# EAGLE board octanis_eps_v05 (EAGLE 7.2.0)
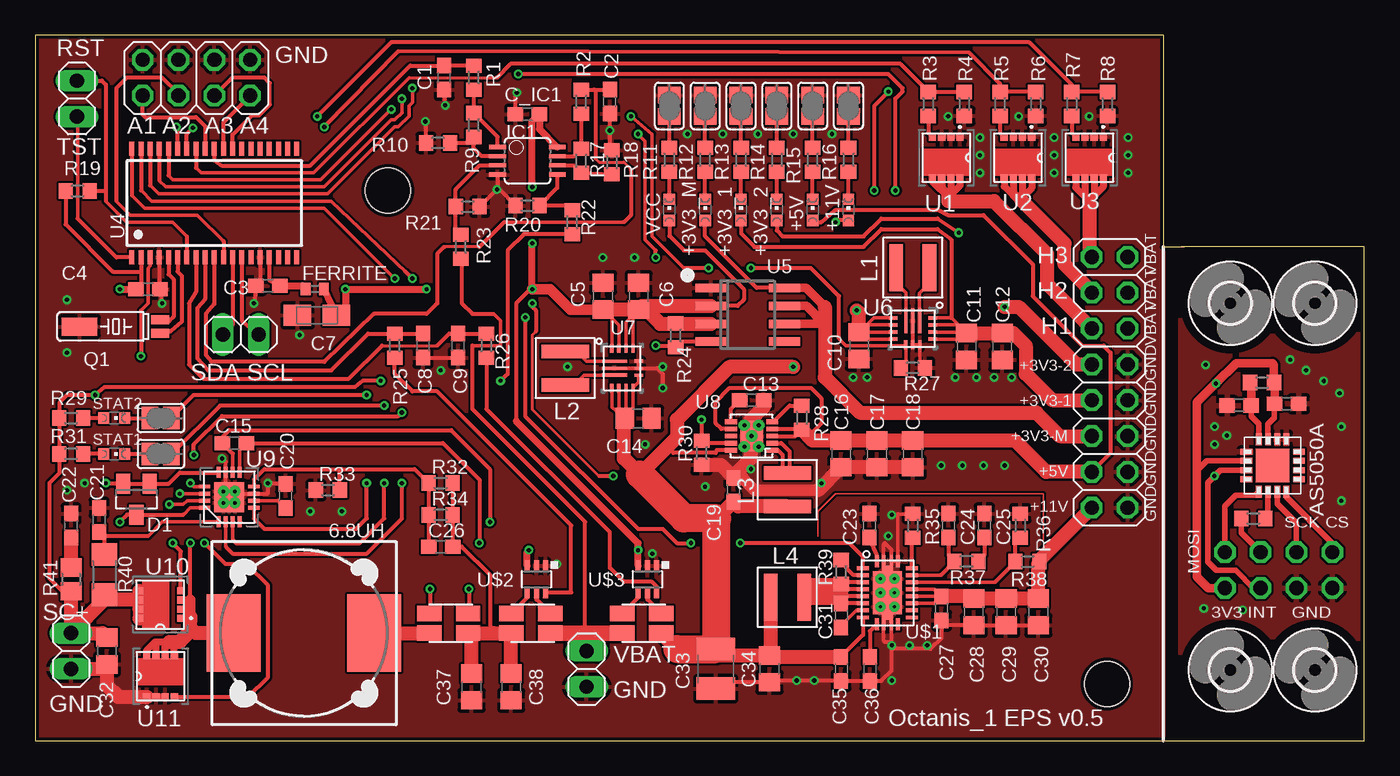
[diagram p0: board, top side]
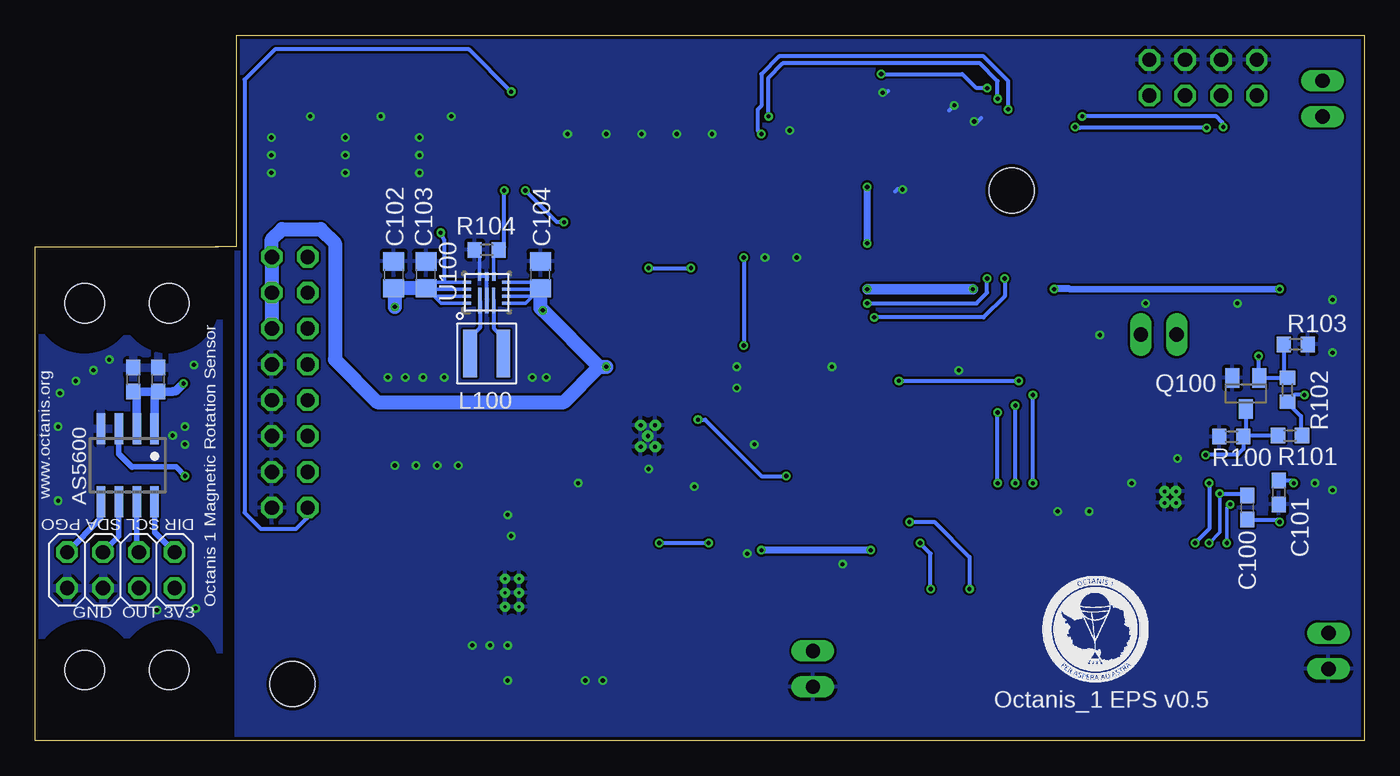
[diagram p1: board, bottom side, seen from below]

Size 94.25 x 50 mm. Coordinates in mm from the lower left corner, seen from the top.
Outline: 81.5,35 94.25,35 94.25,0 80,0 0,0 0,50 80,50 80,35 81.5,35
Outline: 81.5,35 81.25,35
Copper layers (1*16): Top 0.035mm / dielectric 1.5mm / Bottom 0.035mm
Design rules "SeeedStudio_2layer_DRU_no_angle_20140221 *": minimum track width 6mil, minimum drill 0.3mm, track to track 6mil, track to pad 6mil, pad to pad 6mil, via to via 6mil, smd to smd 0mil, copper to edge 10mil, drill to drill 10mil, minimum pad ring 10mil, minimum via ring 6mil, stop-mask expansion 2mil, vias tented up to drill 100mil, thermal gap 10mil
Net classes: 0 default: clearance 0.152 mm; 1 power: width 0.203 mm, drill 0.305 mm, clearance 0.152 mm; 3 fine: width 0.406 mm, drill 0.61 mm, clearance 0.152 mm
Holes 3.2 mm at 25,39 76,4

## Footprints (pad centres in the part's own frame; a part is rotated, then mirrored left to right if it is on the bottom)
DR127 = smd 3.85 x 5.5: 1 -4.975,0; 2 4.975,0
CHIPLED_0603 = smd 0.8 x 0.8: A 0,-0.75; C 0,0.75
SOIC-8 = smd 0.6 x 2.2: 1 -1.215,-2.62; 2 0.055,-2.62; 3 1.325,-2.62; 4 2.595,-2.62; 5 2.595,2.58; 6 1.325,2.58; 7 0.055,2.58; 8 -1.215,2.58
C0603 = smd 1.1 x 1: 1 -0.85,0; 2 0.85,0
C0805 = smd 1.3 x 1.5: 1 -0.95,0; 2 0.95,0
A/3216-18R = smd 1.95 x 1.5: + 1.375,0; - -1.375,0
C1210 = smd 1.6 x 2.7: 1 -1.4,0; 2 1.4,0
SOT23 = smd 1 x 1.4: 1 -0.95,-1.1; 2 0.95,-1.1; 3 0,1.1
0402 = smd 0.7 x 0.9: 1 -0.65,0; 2 0.65,0
2,8 = hole 2.8: 0,0
MSOP08 = smd 0.3 x 1.2: 1 -0.976,-2.113; 2 -0.326,-2.113; 3 0.324,-2.113; 4 0.974,-2.113; 5 0.974,2.112; 6 0.324,2.112; 7 -0.326,2.112; 8 -0.976,2.112
SJ = smd 1.168 x 1.6: 1 -0.762,0; 2 0.762,0
2X04 = drill 1.016 octagon: 1 -3.81,-1.27; 2 -3.81,1.27; 3 -1.27,-1.27; 4 -1.27,1.27; 5 1.27,-1.27; 6 1.27,1.27; 7 3.81,-1.27; 8 3.81,1.27
1X02 = drill 1.016 long: 1 -1.27,0; 2 1.27,0
2X08 = drill 1.016 octagon: 1 -8.89,-1.27; 2 -8.89,1.27; 3 -6.35,-1.27; 4 -6.35,1.27; 5 -3.81,-1.27; 6 -3.81,1.27; 7 -1.27,-1.27; 8 -1.27,1.27; 9 1.27,-1.27; 10 1.27,1.27; 11 3.81,-1.27; 12 3.81,1.27; 13 6.35,-1.27; 14 6.35,1.27; 15 8.89,-1.27; 16 8.89,1.27
XFL4020 = smd 0.965 x 3.353: P$1 -1.181,0; P$2 1.181,0
MS3V-T1R = smd 0.635 x 1.27: P1 -0.47,-4.43; P2 0.47,-4.43 | smd 1.27 x 2.54: P3 0,1.3
R0603 = smd 1 x 1.1: 1 -0.85,0; 2 0.85,0
R1206 = smd 1.6 x 1.803: 1 -1.422,0; 2 1.422,0
R2012 = smd 1.3 x 1.5: 1 -0.85,0; 2 0.85,0
4PADS_RESISTOR = smd 1.727 x 1.1: I1 0,0; I2 2.751,0; V1 0,1.4; V2 2.751,1.4
DQG8 = smd 0.559 x 0.508: 1 -1.47,0.975; 2 -1.47,0.325; 3 -1.47,-0.325; 4 -1.47,-0.975; 5 1.47,-0.975; 6 1.47,-0.325; 7 1.47,0.325; 8 1.47,0.975
TSSOP38_MSPGXX44_SERIES = smd 0.35 x 1: 1 -5.85,-3.85; 2 -5.2,-3.85; 3 -4.55,-3.85; 4 -3.9,-3.85; 5 -3.25,-3.85; 6 -2.6,-3.85; 7 -1.95,-3.85; 8 -1.3,-3.85; 9 -0.65,-3.85; 10 0,-3.85; 11 0.65,-3.85; 12 1.3,-3.85; 13 1.95,-3.85; 14 2.6,-3.85; 15 3.25,-3.85; 16 3.9,-3.85; 17 4.55,-3.85; 18 5.2,-3.85; 19 5.85,-3.85; 20 5.85,3.85; 21 5.2,3.85; 22 4.55,3.85; 23 3.9,3.85; 24 3.25,3.85; 25 2.6,3.85; 26 1.95,3.85; 27 1.3,3.85; 28 0.65,3.85; 29 0,3.85; 30 -0.65,3.85; 31 -1.3,3.85; 32 -1.95,3.85; 33 -2.6,3.85; 34 -3.25,3.85; 35 -3.9,3.85; 36 -4.55,3.85; 37 -5.2,3.85; 38 -5.85,3.85
SO8 = smd 0.6 x 2.2: 1 -1.905,-2.6; 2 -0.635,-2.6; 3 0.635,-2.6; 4 1.905,-2.6; 5 1.905,2.6; 6 0.635,2.6; 7 -0.635,2.6; 8 -1.905,2.6
RNC0014A = smd 1.778 x 0.229: 1 -0.555,0.49; 2 -0.555,0; 3 -0.555,-0.49 | smd 0.229 x 0.61: 4 -0.75,-1.4; 5 -0.25,-1.4; 6 0.25,-1.4; 7 0.75,-1.4; 11 0.75,1.4; 12 0.25,1.4; 13 -0.25,1.4; 14 -0.75,1.4 | smd 0.61 x 0.229: 8 1.15,-0.5; 9 1.15,0; 10 1.15,0.5
S-PVSON-N10 = smd 0.28 x 0.825: 1 -1,-1.462; 2 -0.5,-1.462; 3 0,-1.462; 4 0.5,-1.462; 5 1,-1.462; 6 1,1.462; 7 0.5,1.462; 8 0,1.462; 9 -0.5,1.462; 10 -1,1.462 | smd 2.15 x 1.6: EXPAD 0,0 | drill 0.3 pad 0.605: GND1 -0.762,0.508 | drill 0.3 pad 0.61: GND2 -0.762,-0.508; GND3 0,0; GND4 0.762,-0.508 | drill 0.305 pad 0.605: GND5 0.762,0.508
RVA16_2P14X2P14 = smd 0.787 x 0.279: 1 -1.75,0.75; 2 -1.75,0.25; 3 -1.75,-0.25; 4 -1.75,-0.75; 9 1.75,-0.75; 10 1.75,-0.25; 11 1.75,0.25; 12 1.75,0.75 | smd 0.279 x 0.787: 5 -0.75,-1.75; 6 -0.25,-1.75; 7 0.25,-1.75; 8 0.75,-1.75; 13 0.75,1.75; 14 0.25,1.75; 15 -0.25,1.75; 16 -0.75,1.75 | smd 2.134 x 2.134: 17 0,0 | drill 0.254: V -0.406,-0.406; V_1 -0.406,0.406; V_2 0.406,-0.406; V_3 0.406,0.406
R-PVQFN-N20 = smd 0.85 x 0.28: P$1 0,0; P$10 4.45,0; P$11 4.45,1.5; P$20 0,1.5 | smd 0.28 x 0.85: P$2 0.475,-0.975; P$3 0.975,-0.975; P$4 1.475,-0.975; P$5 1.975,-0.975; P$6 2.475,-0.975; P$7 2.975,-0.975; P$8 3.475,-0.975; P$9 3.975,-0.975; P$12 3.975,2.475; P$13 3.475,2.475; P$14 2.975,2.475; P$15 2.475,2.475; P$16 1.975,2.475; P$17 1.475,2.475; P$18 0.975,2.475; P$19 0.475,2.475 | smd 3.05 x 2.05: PGND1 2.225,0.75 | smd 1.15 x 0.23: PGND2 0.15,1.025; PGND3 0.15,0.475; PGND4 4.3,0.475; PGND5 4.3,1.025 | smd 3.85 x 0.78: PGND6 2.225,0.75 | drill 0.2 pad 0.4: PGND7 2.225,0.25; PGND8 1.225,0.25; PGND9 1.225,1.25; PGND10 2.225,1.25; PGND11 3.225,0.25; PGND12 3.225,1.25
SC70-6 = smd 0.35 x 0.8: 1 -0.65,-0.95; 2 0,-0.95; 3 0.65,-0.95; 4 0.65,0.95; 5 0,0.95; 6 -0.65,0.95
QFN.16 = smd 0.85 x 0.42: 1 -1.875,0.975; 2 -1.875,0.325; 3 -1.875,-0.325; 4 -1.875,-0.975; 9 1.875,-0.975; 10 1.875,-0.325; 11 1.875,0.325; 12 1.875,0.975 | smd 0.42 x 0.85: 5 -0.975,-1.875; 6 -0.325,-1.875; 7 0.325,-1.875; 8 0.975,-1.875; 13 0.975,1.875; 14 0.325,1.875; 15 -0.325,1.875; 16 -0.975,1.875 | smd 2.4 x 2.4: PAD 0,0

## Placement (x,y rotation side)
6.8UH  DR127  [DR127]  19.05,7.62 0 top
+3V3_1  3V3-1  [CHIPLED_0603]  50.05,37.62 0 top
+3V3_2  3V3-2  [CHIPLED_0603]  52.59,37.62 0 top
+3V3_M  3V3-M  [CHIPLED_0603]  47.51,37.62 0 top
+5V  5V  [CHIPLED_0603]  55.13,37.62 0 top
+11V  12V  [CHIPLED_0603]  57.67,37.62 0 top
AS5600  AS5600  [SOIC-8]  87,19.5 180 bottom
C1  1.5uF  [C0603]  29,47 90 top
C2  1.5uF  [C0603]  40.75,45.29 90 top
C3  100nF  [C0603]  16.5,32.25 180 top
C4  100nF  [C0603]  8,32 0 top
C5  22uF  [C0805]  40.27,31.5 90 top
C6  22uF  [C0805]  42.79,31.5 90 top
C7  10uF  [A/3216-18R]  19.98,30.15 0 top
C8  1.5uF  [C0603]  27.5,28 90 top
C9  1.5uF  [C0603]  30,28 90 top
C10  10uF  [C0805]  58.42,28 270 top
C11  22uF  [C0805]  66.04,27.94 270 top
C12  22uF  [C0805]  68.58,27.94 270 top
C13  10nF  [C0603]  50.8,24.13 0 top
C14  10uF  [C0805]  42.75,22.84 0 top
C15  100nF  [C0603]  14.11,21.09 180 top
C16  22uF  [C0805]  57.15,20.32 270 top
C17  22uF  [C0805]  59.69,20.32 270 top
C18  22uF  [C0805]  62.23,20.32 270 top
C19  22uF  [C0603]  49.53,17.78 90 top
C20  1uF  [C0603]  17.76,17.34 90 top
C21  1u  [C0603]  4.53,15.65 90 top
C22  2.2uF  [C0603]  2.54,15.24 90 top
C23  2.2uF  [C0603]  59.17,15.24 90 top
C24  150pF  [C0603]  64.77,15.24 90 top
C25  4.7nF  [C0603]  67.31,15.24 90 top
C26  22pF  [C0603]  28.75,13.75 180 top
C27  1uF  [C0603]  64.27,9.37 90 top
C28  22uF  [C0805]  66.56,9.12 90 top
C29  22uF  [C0805]  68.85,9.12 90 top
C30  22uF  [C0805]  71.14,9.12 90 top
C31  100nF  [C0603]  57.15,8.87 270 top
C32  10uF  [C0805]  5.08,6.35 90 top
C33  47uF Tantal  [C1210]  48.26,5.08 270 top
C34  10uF  [C0805]  52.07,5.08 270 top
C35  100nF  [C0603]  57.15,5.08 270 top
C36  47nF  [C0603]  59.19,5.08 270 top
C37  10uF  [C0805]  30.94,3.81 270 top
C38  10uF  [C0805]  33.75,3.81 270 top
C39  4u7  [C0603]  85.38,23.75 0 top
C40  100n  [C0603]  88.75,23.88 0 top
C41  10u  [C0603]  87.3,25.6 270 bottom
C42  100n  [C0603]  85.54,25.6 270 bottom
C100  100nF  [C0603]  8.3,16.51 270 bottom
C101  1uF  [C0603]  6.07,17.6 270 bottom
C102  22uF  [C0805]  68.83,33.02 90 bottom
C103  22uF  [C0805]  66.54,33.02 90 bottom
C104  10uF  [C0805]  58.42,33.02 90 bottom
C_IC1  100nF  [C0603]  34.91,44.4 0 top
D1  BAT54C  [SOT23]  7.18,17.11 180 top
FERRITE  100mH  [0402]  19.82,32.02 180 top
H1  MOUNT-HOLE2.8  [2,8]  84.75,5 90 top
H2  MOUNT-HOLE2.8  [2,8]  90.75,5 90 top
H3  MOUNT-HOLE2.8  [2,8]  84.75,31 90 top
H4  MOUNT-HOLE2.8  [2,8]  90.75,31 90 top
IC1  OPA2333DGK  [MSOP08]  34.91,41.1 270 top
J1  [SJ]  44.97,44.99 270 top
J2  [SJ]  47.51,44.99 270 top
J3  [SJ]  50.05,44.99 270 top
J4  [SJ]  52.59,44.99 270 top
J5  [SJ]  55.13,44.99 270 top
J6  [SJ]  57.67,44.99 270 top
J7  [SJ]  8.91,22.86 180 top
J8  [SJ]  8.91,20.32 180 top
JP1  [2X04]  11.43,46.99 0 top
JP2  [1X02]  2.96,45.51 270 top
JP3  [1X02]  14.57,28.78 0 top
JP4  [2X08]  76.2,25.4 90 top
JP5  [1X02]  2.54,6.35 90 top
JP6  [1X02]  39.1,5.08 90 top
JP7  [2X04]  88.17,12.08 180 bottom
L1  1uH  [XFL4020]  62.23,33.52 0 top
L2  1uH  [XFL4020]  37.58,26.4 90 top
L3  1uH  [XFL4020]  53.34,17.78 90 top
L4  1.5uH  [XFL4020]  53.34,10.16 0 top
L100  1uH  [XFL4020]  62.23,27.44 180 bottom
Q1  32.768kHz  [MS3V-T1R]  4.44,29.35 90 top
Q100  BSS123  [SOT23]  8.4,24.61 180 bottom
R1  1k  [R0603]  31.1,47 270 top
R2  1k  [R0603]  38.72,45.29 270 top
R3  1k  [R0603]  63.34,45.13 90 top
R4  1M  [R0603]  65.88,45.13 270 top
R5  1k  [R0603]  68.42,45.13 90 top
R6  1M  [R0603]  70.96,45.13 270 top
R7  1k  [R0603]  73.5,45.13 90 top
R8  1M  [R0603]  76.04,45.13 270 top
R9  100k  [R0603]  31.1,43.64 270 top
R10  200k  [R0603]  28.56,42.37 180 top
R11  1k  [R0603]  44.97,41.18 270 top
R12  1k  [R0603]  47.51,41.18 270 top
R13  1k  [R0603]  50.05,41.18 270 top
R14  1k  [R0603]  52.59,41.18 270 top
R15  1.5k  [R0603]  55.13,41.18 270 top
R16  4.7k  [R0603]  57.67,41.18 270 top
R17  100k  [R0603]  38.72,41.1 270 top
R18  200k  [R0603]  40.89,41 90 top
R19  10k  [R0603]  3,38.96 180 top
R20  100k  [R0603]  34.91,37.92 0 top
R21  100k  [R0603]  30.67,37.85 180 top
R22  200k  [R0603]  38.08,36.75 270 top
R23  200k  [R0603]  30.17,35 270 top
R24  1M  [R0603]  45.42,28.72 90 top
R25  1k  [R0603]  25.5,28 270 top
R26  1k  [R0603]  32,28 270 top
R27  1M  [R0603]  62.23,26.42 0 top
R28  1M  [R0603]  54.36,22.88 270 top
R29  4k7  [R0603]  2.54,22.86 180 top
R30  1M  [R0603]  47.26,20.39 90 top
R31  4k7  [R0603]  2.54,20.32 180 top
R32  100k  [R0603]  28.75,18.25 0 top
R33  100k  [R0603]  20.75,17.75 0 top
R34  2.2M  [R0603]  28.75,16 0 top
R35  270k  [R0603]  62.23,15.24 270 top
R36  56k  [R0603]  69.85,15.24 270 top
R37  150-220k  [R0603]  66.04,12.7 180 top
R38  470k  [R0603]  70.37,12.68 0 top
R39  47k  [R0603]  57.15,11.95 270 top
R40  10  [R1206]  4.91,11.76 90 top
R41  2  [R2012]  2.54,11.43 270 top
R42  15R  [R0603]  87,25.38 0 top
R43  15R  [R0603]  86.38,15.74 0 top
R100  [R0603]  9.42,21.55 0 bottom
R101  [R0603]  5.26,21.62 0 bottom
R102  1M  [R0603]  5.45,24.86 270 bottom
R103  1M  [R0603]  4.85,28.08 180 bottom
R104  1M  [R0603]  62.23,34.79 180 bottom
R_SENSE1  RSENSE1 10mOhm  [4PADS_RESISTOR]  27.94,7.62 0 top
R_SENSE2  RSENSE1  [4PADS_RESISTOR]  41.64,7.62 0 top
RSENSE1  RSENSE2  [4PADS_RESISTOR]  33.77,7.62 0 top
STAT1  5V-ok  [CHIPLED_0603]  5.6,20.32 270 top
STAT2  5V-ok  [CHIPLED_0603]  5.6,22.86 270 top
U1  CSD16327Q3_DQG_8  [DQG8]  64.61,41.32 270 top
U2  CSD16327Q3_DQG_8  [DQG8]  69.69,41.32 270 top
U3  CSD16327Q3_DQG_8  [DQG8]  74.77,41.32 270 top
U4  MSP430G2544  [TSSOP38_MSPGXX44_SERIES]  12.7,38.1 0 top
U5  TPS2022D  [SO8]  50.52,30.18 270 top
U6  Value  [RNC0014A]  62.23,29.21 270 top
U7  Value  [RNC0014A]  41.64,26.4 0 top
U8  TPS61232  [S-PVSON-N10]  50.8,21.59 90 top
U9  BQ24650_RVA_16  [RVA16_2P14X2P14]  13.76,17.26 90 top
U10  CSD16327Q3_DQG_8  [DQG8]  8.86,9.64 180 top
U11  CSD16327Q3_DQG_8  [DQG8]  8.89,4.56 90 top
U100  Value  [RNC0014A]  62.23,31.75 90 bottom
U$1  TPS61088  [R-PVQFN-N20]  59.69,12.7 270 top
U$2  INA213  [SC70-6]  35.54,11.43 180 top
U$3  INA213  [SC70-6]  43.41,11.43 180 top
U$4  AS5050.QFN  [QFN.16]  87.75,19.5 90 top
VCC  3V3-EPS  [CHIPLED_0603]  44.97,37.62 0 top

## Library data of the parts
6.8UH FERRITE = inductors
+3V3_1 +3V3_2 +3V3_M +5V +11V STAT1 STAT2 VCC = adafruit
AS5600 U$4 = austriamicrosystems
C1-C4 C7-C9 C13 C15 C19-C27 C31 C33 C35 C36 C39-C42 C100 C101 C_IC1 R1-R23 R25 R26 R28-R34 R40-R43 R100-R103 = rcl
C5 C6 C10-C12 C14 C16-C18 C28-C30 C32 C34 C37 C38 C102-C104 R24 R27 R35-R39 R104 = resistor
D1 = diode
H1-H4 = holes
IC1 = linear
J1-J8 = jumper
JP1-JP7 = Headerlibrary
L1-L4 L100 = Coilcraft
Q1 = microcrystal
Q100 = transistor-small-signal
R_SENSE1 R_SENSE2 RSENSE1 U4 U5 U$2 U$3 = Octanis1_EPS
U1-U3 U10 U11 = texasinstruments; DATASHEETURL: http://www.ti.com/lit/gpn/CSD16327Q3; DESCRIPTION: N-Channel NexFET Power MOSFET; FAMILY_NAME: N-Channel MOSFET Transistors; GENERIC_PART_NUMBER: CSD16327Q3; INDUSTRY_STD_PKG_TYPE: SON; MANUFACTURER: Texas Instruments; PACKAGE_DESIGNATOR: DQG; PIN_COUNT: 8
U6 U7 U100 = octanis_eps_v05; ALTERNATEPARTNUMBER: TPS630250RNCT; COMPTYPE: IC; MANUFACTURER: Texas Instruments; MOUNTTYPE: SMT; PACKAGEREFERENCE: RNC0014A; PARTNUMBER: TPS630250RNCR; PIN_COUNT: 14; REFDES: RefDes; TYPE: TYPE
U8 U$1 = texasinstruments
U9 = octanis_eps_v05; DATASHEETURL: http://www.ti.com/lit/gpn/BQ24650; DESCRIPTION: High Efficiency Synchronous Switch-Mode Charger Controller ? Solar Battery Charger; FAMILY_NAME: BATTERY CHARGE MANAGEMENT; GENERIC_PART_NUMBER: BQ24650; INDUSTRY_STD_PKG_TYPE: VQFN; MANUFACTURER: Texas Instruments; PACKAGE_DESIGNATOR: RVA; PIN_COUNT: 16

## Nets
+3V1: AS5600.1 AS5600.2 C40.1 C41.2 C42.2 JP7.2 R42.2 U$4.11 U$4.14
+3V3: C4.1 C5.1 C6.1 C7.+ C_IC1.2 FERRITE.1 IC1.8 R19.2 R24.2 U4.2 U5.2 U5.3 U7.11 U7.12 U7.13 U7.14 U$2.3 U$3.3 VCC.A
+3V3_1: +3V3_1.A C11.1 C12.1 JP4.8 U6.11 U6.12 U6.13 U6.14
+3V3_2: +3V3_2.A C102.1 C103.1 JP4.10 U100.11 U100.12 U100.13 U100.14
+3V3_M: +3V3_M.A JP4.6 U5.6 U5.7 U5.8
+5V [fine]: +5V.A C16.1 C17.1 C18.1 JP4.4 R28.2 U8.3 U8.4 U8.7
+12V [fine]: +11V.A C27.2 C28.2 C29.2 C30.2 JP4.2 R38.2 U$1.P$14 U$1.P$15 U$1.P$16
A_EXT1: JP1.1 U4.30
A_EXT2: JP1.3 U4.11
A_EXT3: JP1.5 U4.27
A_EXT4: JP1.7 U4.28
BAT+: JP6.2 R23.2 R_SENSE2.I1 RSENSE1.I2
BAT_OUT: C10.1 C14.1 C19.1 C33.1 C34.1 C35.1 C104.1 JP4.11 JP4.13 JP4.15 L3.P$1 L4.P$1 R_SENSE2.I2 U6.4 U6.5 U6.6 U6.7 U7.4 U7.5 U7.6 U7.7 U7.8 U8.10 U100.4 U100.5 U100.6 U100.7 U$1.P$9
CS/PGO: AS5600.5 JP7.7 U$4.4
EN_3V3_1: R27.1 U4.35 U6.8
EN_3V3_2: R104.1 U4.36 U100.8
EN_3V3_M: R24.1 U4.34 U5.4
EN_5V: R30.2 U4.37 U8.9
EN_12V: U4.38 U$1.P$2
EN_HEAT1: R3.2 R4.1 U4.31
EN_HEAT2: R5.2 R6.1 U4.32
EN_HEAT3: R7.2 R8.1 U4.33
EN_SC: Q100.1 R102.1 R103.2 U4.3
GND [power]: C1.1 C2.1 C3.2 C4.2 C5.2 C6.2 C7.- C8.1 C9.1 C10.2 C11.2 C12.2 C13.2 C14.2 C16.2 C17.2 C18.2 C19.2 C20.2 C21.2 C22.2 C23.2 C24.2 C25.2 C27.1 C28.1 C29.1 C30.1 C32.1 C33.2 C34.2 C35.2 C36.2 C37.2 C38.2 C101.2 C102.2 C103.2 C104.2 C_IC1.1 IC1.4 J1.1 J2.1 J3.1 J4.1 J5.1 J6.1 JP1.2 JP1.4 JP1.6 JP1.8 JP4.1 JP4.3 JP4.5 JP4.7 JP4.9 JP5.1 JP6.1 Q1.P3 Q100.2 R4.2 R6.2 R8.2 R10.2 R18.2 R20.1 R21.1 R27.2 R30.1 R33.1 R35.1 R36.1 R100.1 R103.1 R104.2 U1.1 U1.2 U1.3 U2.1 U2.2 U2.3 U3.1 U3.2 U3.3 U4.4 U4.15 U5.1 U6.2 U6.9 U6.10 U7.2 U7.9 U7.10 U8.EXPAD U8.GND1 U8.GND2 U8.GND3 U8.GND4 U8.GND5 U9.7 U9.11 U9.17 U9.V U9.V_1 U9.V_2 U9.V_3 U11.1 U11.2 U11.3 U100.2 U100.9 U100.10 U$1.P$20 U$1.PGND1 U$1.PGND2 U$1.PGND3 U$1.PGND4 U$1.PGND5 U$1.PGND6 U$1.PGND7 U$1.PGND8 U$1.PGND9 U$1.PGND10 U$1.PGND11 U$1.PGND12 U$2.1 U$2.2 U$3.1 U$3.2
GND1: AS5600.4 C39.1 C40.2 C41.1 C42.1 JP7.6 JP7.8 U$4.9 U$4.10 U$4.13
HEAT1: JP4.12 U1.5 U1.6 U1.7 U1.8
HEAT2: JP4.14 U2.5 U2.6 U2.7 U2.8
HEAT3: JP4.16 U3.5 U3.6 U3.7 U3.8
I2C_SCL: JP3.2 U4.13
I2C_SDA: JP3.1 U4.12
I_IN: C8.2 R25.1 U4.9
I_OUT: C9.2 R26.1 U4.8
IND: L3.P$2 U8.1 U8.2
INT/OUT: AS5600.3 JP7.4 U$4.15
LED5: +5V.C R15.2
MISO/SCL: AS5600.7 JP7.3 R43.1
MOSI/DIR: AS5600.8 JP7.1 U$4.1
N$1: L2.P$1 U7.3
N$2: R28.1 U8.5
N$3: L2.P$2 U7.1
N$4: 6.8UH.2 R_SENSE1.I1
N$5: C13.1 U8.6
N$6: L1.P$1 U6.3
N$7: L1.P$2 U6.1
N$9: C39.2 R42.1 U$4.12
N$10: R43.2 U$4.2
N$11: L100.P$1 U100.3
N$12: L100.P$2 U100.1
N$14: J5.2 R15.1
N$19: IC1.1 R1.2 R9.1
N$20: IC1.2 R9.2 R10.1
N$21: IC1.3 R21.2 R23.1
N$22: IC1.7 R2.2 R17.1
N$23: IC1.6 R17.2 R18.1
N$24: IC1.5 R20.2 R22.1
N$25: R26.2 U$3.6
N$26: R25.2 U$2.6
N$27: R7.1 U3.4
N$30: Q1.P1 U4.6
N$31: R5.1 U2.4
N$32: R_SENSE2.V1 U$3.4
N$33: R_SENSE2.V2 U$3.5
N$34: RSENSE1.V1 U$2.4
N$35: RSENSE1.V2 U$2.5
N$36: Q1.P2 U4.5
N$37: R3.1 U1.4
N$38: C31.2 U$1.P$8
N$39: +3V3_M.C R12.2
N$40: J2.2 R12.1
N$43: R11.2 VCC.C
N$45: J1.2 R11.1
N$46: +3V3_2.C R14.2
N$47: J4.2 R14.1
N$48: +11V.C R16.2
N$49: J6.2 R16.1
N$50: C31.1 L4.P$2 R39.2 U$1.P$4 U$1.P$5 U$1.P$6 U$1.P$7
N$51: +3V3_1.C R13.2
N$52: J3.2 R13.1
N$53: R39.1 U$1.P$3
N$54: C25.1 R37.1
N$56: C36.1 U$1.P$10
N$57: R35.2 U$1.P$19
N$58: C24.1 R37.2 U$1.P$18
N$59: C23.1 U$1.P$1
N$60: R36.2 R38.1 U$1.P$17
N$64: Q100.3 R100.2 R101.1 U9.2
N$65: C22.1 R41.1
N$66: R31.1 STAT1.A
N$67: J7.2 STAT2.C
N$68: J8.2 STAT1.C
N$69: R29.1 STAT2.A
N$70: J7.1 U9.5
N$71: J8.1 U9.3
N$72: C20.1 U9.6
N$73: C21.1 R40.2 U9.1
N$75: JP2.2 U4.1
N$76: 6.8UH.1 C100.1 U9.14 U10.1 U10.2 U10.3 U11.5 U11.6 U11.7 U11.8
N$77: C15.2 R_SENSE1.V1 U9.10
N$78: C15.1 R_SENSE1.V2 U9.9
N$80: U9.15 U10.4
N$81: U9.13 U11.4
N$82: C26.2 R32.1 R33.2 R34.1 U9.8
N$84: C101.1 D1.1 D1.2 U9.12
N$85: C100.2 D1.3 U9.16
N$93: JP2.1 R19.1 U4.7
N$99: C3.1 FERRITE.2 U4.16
SC+: C32.2 JP5.2 R22.2 R29.2 R31.2 R40.1 R41.2 R101.2 R102.2 U10.5 U10.6 U10.7 U10.8
SC_OUT: C26.1 C37.1 C38.1 R32.2 R34.2 R_SENSE1.I2 RSENSE1.I1
SCLK/SDA: AS5600.6 JP7.5 U$4.3
V_BAT: C1.2 R1.1 U4.29
V_SC: C2.2 R2.1 U4.10

## Tracks (layer width: path | path; a pad name or v marks a point on that pad's centre or on a via)
+3V1  (via drill 0.3)
  Top 0.406: 82.49,17.11 82.38,17.11 | U$4.14 83.08,19.82 82.38,19.12 | U$4.11 87.42,22.43 87.88,22.88 87.88,23.85 C40.1 87.85,23.93
  Top 0.61: JP7.2 83.19,10.81 82.38,11.62 82.38,17.11 82.38,17.26 82.38,19.12 82.38,23.97 83.37,24.96 | v83.73,25.32 83.37,24.96 | 88.17,23.74 C40.1 87.9,25.32 R42.2 87.85,26.65 87.75,26.75 85.16,26.75 v83.73,25.32 | v83.73,25.32 83.37,24.96
  Bottom 0.61: 87.05,24.75 AS5600.2 | AS5600.1 85.78,24.5 arc90 C42.2 | C42.2 84.5,24.75 arc-90 84.5,24.75 84.29,24.75 v83.73,25.32 | 87.05,24.75 C41.2 87.05,24.75 | 87.05,24.75 C42.2
+3V3  (via drill 0.3)
  Top 0.25: U7.14 40.89,29.93 C5.1 41.39,29.43 U7.13 | U7.12 41.89,29.65 C6.1 42.39,30.15 U7.11
  Top 0.3: U4.2 7.5,33.25 | 7.5,33.25 7.5,32.39 C4.1 | R19.2 2.16,36.59 5.5,33.25 7.5,33.25 | FERRITE.1 20.43,32.02 | 22,30.8 C7.+ | U5.3 45.45,29.55 R24.2 | VCC.A 44.97,35.78 46,34.75 47.5,34.75 50.25,32 50.25,31.25 49.81,30.82 U5.2 | v42.76,13.49 v42.75,13.5 | v35.25,32 35.1,32 34.1,31 34.1,22.65
  Top 0.5: IC1.8 35.76,43.34 C_IC1.2 35.25,43.89 v35.25,39.25 | 20.43,32.02 C7.+ | v6,32 C4.1 | 22,30.8 v22,32 v27.75,32 | U$2.3 34.89,13.39 v35,13.5 | U$3.3 v42.76,13.49 | v42.75,13.5 42.75,14 34.1,22.65 | v35.25,32 v35.25,35.25
  Top 0.75: v35.25,32 36.5,32 37.95,30.55 C5.1
  Top 1: C5.1 C6.1 43.05,30.82 | 43.05,30.82 U5.2 | 43.05,30.82 44.33,29.55 U5.3
  Bottom 0.3: 21.95,32.05 v22,32
  Bottom 0.5: v6,32 20.95,32.05 21.95,32.05 | v35,13.5 v42.75,13.5 | v35.25,35.25 v35.25,39.25
  Bottom 0.75: v27.75,32 v35.25,32
+3V3_1
  Top 0.25: U6.14 64.97,29.96 65.47,29.46 | 65.47,29.46 C11.1 | U6.13 65.47,29.46 | U6.12 65.97,28.96 C11.1 | U6.11 65.61,28.46 C11.1
  Top 0.3: 64.97,29.96 64.97,35.53 64,36.25 60,36.25 58.75,35 51,35 50.05,35.95 +3V3_1.A
  Top 1: C11.1 C12.1 69.36,28.89 70.25,28 70.25,26 72.12,24.13 JP4.8
+3V3_2  (via drill 0.3)
  Top 0.3: +3V3_2.A 52.59,36.16 53,35.75 58.75,35.75 60,37 64,37 v65.5,36
  Top 1: v68.75,30.75 69.75,30.75 73.83,26.67 JP4.10
  Bottom 0.25: U100.14 65.47,31 C103.1 | U100.13 65.97,31.5 C103.1 | U100.12 65.97,32 C103.1 | U100.11 65.25,32.5 66.11,32.5 C103.1
  Bottom 0.3: 65.25,32.5 65.25,35.5 v65.5,36
  Bottom 1: C103.1 C102.1 68.75,32.07 v68.75,30.75
+3V3_M
  Top 0.3: U5.8 51.16,32.09 47.5,35.75 47.5,36.61 +3V3_M.A
  Top 0.6: U5.8 54.66,32.09 56,30.75 | U5.7 54.69,30.82 55.88,29.62 | 55.88,29.62 56,29.5 | U5.6 55.8,29.55 55.88,29.62
  Top 1: 56,30.75 56,29.5 56,25.75 58.5,23.25 71,23.25 72.66,21.59 JP4.6
+5V
  Top 0.3: U8.4 54.3,22.09 R28.2 53.92,21.59 U8.3 | U8.7 48.66,22.09 48.25,22.5 48.25,24 49.25,25 55,25 55.75,24.25 55.75,22.5 54.82,21.57 | +5V.A 55.25,36.75 55.75,36.75 56.75,37.62 64,37.62 64.75,37.25 67.25,37.25 70.75,33.75 70.75,31.5 74.25,28 75.75,28 76.25,27.5 76.25,20.37 JP4.4
  Top 1: JP4.4 71.7,19.05 69.5,21.25 62.25,21.25 C18.1 C17.1 C16.1 55.12,21.27 54.82,21.57 R28.2
+12V  (via drill 0.3)
  Top 0.25: U$1.P$16 63.77,10.72 | U$1.P$14 63.77,9.72 | U$1.P$15 C27.2
  Top 0.3: 63.77,10.72 C27.2 | 63.77,9.72 C27.2 | C27.2 | v59.5,39 59.5,45 v60.5,46 | +11V.A 56.87,36.87 v56.75,36.75
  Top 1: C27.2 66.41,10.22 C28.2 C29.2 C30.2 71.14,12.6 R38.2 71.22,12.8 JP4.2
  Bottom 0.3: v60.5,46 63.5,49 77.25,49 79.4,46.85 79.4,16.15 78.25,15 75.75,15 75,15.75 75,16.44 JP4.2 | v56.75,36.75 57.25,36.75 v59.5,39
A_EXT1
  Top 0.3: JP1.1 7.6,45.7 7.6,44.4 7.8,44.2 11.4,44.2 12.05,43.55 U4.30
A_EXT2
  Top 0.25: 5.75,38.25 6.75,37.25 11.5,37.25 13.35,35.4
  Top 0.3: JP1.3 10.16,45.84 9,47 6.5,47 5.75,46.25 5.75,38.25 | 13.35,35.4 U4.11
A_EXT3
  Top 0.3: JP1.5 13.97,46.99 16.26,46.99 16.64,46.61 16.64,45.09 15.88,44.32 15.37,44.32 14,42.96 U4.27
A_EXT4
  Top 0.3: U4.28 13.35,43.83 JP1.7
BAT+
  Top 0.25: 31,28 33,28 33,29.75 32.5,30.25
  Top 0.3: RSENSE1.I2 38.87,7.62 39,7.75 39,15.5 31,23.5 31,28 | R23.2 30.25,34.13 30.25,31 31,30.25 32.5,30.25
  Top 1: JP6.2 39.1,7.47 39.25,7.62
  Top 1.1: RSENSE1.I2 39.25,7.62 R_SENSE2.I1
BAT_OUT  (via drill 0.3)
  Top 0.25: U6.4 59.49,29.96 C10.1 | U6.5 58.99,29.46 C10.1 | U6.6 58.49,28.96 C10.1 | U6.7 58.85,28.46 C10.1 | C14.1 42.39,23.54 U7.7 42.79,25.4 U7.8 | U7.6 41.89,23.04 C14.1 | U7.5 41.39,23.14 C14.1 | U7.4 40.89,23.64 C14.1
  Top 0.3: U8.10 48.34,20.59 48.25,20.39 45.25,20.39 44.88,20.88 | U$1.P$9 58.72,7.5 C35.1
  Top 1: R_SENSE2.I2 45.53,6.48 | C33.1 48.71,6.03 C34.1 52.16,6.12 | 52.16,6.12 L4.P$1 | C19.1 48.26,15.66 | C19.1 48.35,15.75 | C14.1 41.75,22.79 41.75,20 42.88,18.88 44.88,20.88 45.5,21.5 45.5,22.75 49.25,26.5 v53.75,26.5 | C10.1 58.42,30.33 v58.25,30.5 | L3.P$1 49.86,16.6 C19.1 | 52.16,6.12 52.35,5.93 C35.1
  Top 2: 45.53,6.48 C33.1 48.26,15.66 | 48.35,15.75 46,15.75 42.88,18.88
  Bottom 0.25: U100.7 58.85,32.5 C104.1 | U100.4 59.49,31 C104.1 | U100.5 58.99,31.5 C104.1 | U100.6 58.49,32 C104.1
  Bottom 1: C104.1 58.42,30.67 v58.25,30.5 54.25,26.5 | 54.25,26.5 v53.75,26.5 | 54.25,26.5 56.75,24 70,24 73,27 73,35.25 74,36.25 76.75,36.25 77.47,35.53 JP4.15 JP4.13 JP4.11
CS/PGO
  Top 0.406: U$4.4 88.72,17.27 92,14 92,13.37 JP7.7
  Bottom 0.406: AS5600.5 89.59,15.74 JP7.7
EN_3V3_1  (via drill 0.3)
  Top 0.25: 8.8,39.7 9.25,39.25 20.5,39.25 25.25,44 25.5,44 26,44.5 v26,45.5 | U6.8 61.73,26.77 R27.1 | 61.67,28 57.5,28 57,28.5 | 46,33.5 43.75,35.75 43.75,43 v42.25,44.25
  Top 0.3: U4.35 8.8,39.7 | U6.8 61.67,28 | 57,28.5 57,31.5 55,33.5 v50.75,33.5 | v47.75,33.5 46,33.5
  Bottom 0.3: v50.75,33.5 v47.75,33.5 | v26,45.5 26,46.75 27.25,48 41.25,48 42.25,47 v42.25,44.25
EN_3V3_2  (via drill 0.3)
  Top 0.25: 8.15,39.35 8.75,38.75 20.75,38.75 25.5,43.5 25.75,43.5 26.5,44.25 26.5,45 26.75,45.25 v26.75,46.25
  Top 0.3: U4.36 8.15,39.35 | v34.25,47.25 60.5,47.25 61.5,46.25 61.5,46 61,45.5 v61,39
  Bottom 0.25: U100.8 61.73,34.44 R104.1
  Bottom 0.3: R104.1 61.38,34.87 61,35 v61,39 | v34.25,47.25 28.5,47.25 27.5,46.25 v26.75,46.25
EN_3V3_M  (via drill 0.3)
  Top 0.25: 9.45,40.05 9.75,39.75 20.25,39.75 v25.25,44.75 | 44,34.75 43.25,35.5 43.25,42.5 v42.75,43
  Top 0.3: U5.4 45.83,28.27 R24.1 45.29,28 v44,28 | U4.34 9.45,40.05 | v44,34.25 44,34.75
  Bottom 0.3: v44,34.25 v44,28 | v25.25,44.75 25.25,46.75 27,48.5 41.5,48.5 42.75,47.25 42.75,45 43,44.75 43,43.25 v42.75,43
EN_5V  (via drill 0.3)
  Top 0.2: 40,18.75 35.25,23.5 35.25,28.75 35.5,29
  Top 0.25: 7.5,39 8.25,38.25 21,38.25 26.25,33.25
  Top 0.3: U4.37 7.5,39 | U8.9 47.41,21.09 R30.2 v47.25,22.75 | v41,18.75 40,18.75 | 26.25,33.25 v26.75,32.75 | v35.25,31 35.25,30.75 35.5,30.5 35.5,29
  Bottom 0.3: v47.25,22.75 46.75,22.75 42.75,18.75 v41,18.75 | v35.25,31 27.5,31 26.75,31.75 v26.75,32.75
EN_12V  (via drill 0.3)
  Top 0.25: 6.85,38.65 7.75,37.75 20.5,37.75 v25.5,32.75
  Top 0.3: U4.38 6.85,38.65 | U$1.P$2 58.72,13.04 57.75,14 v50,14 | v34.75,30 34.75,23 42.75,15 44.5,15 45.5,14 v46.5,14
  Bottom 0.3: v25.5,32.75 25.5,31.5 27,30 v34.75,30 | v46.5,14 v50,14
EN_HEAT1
  Top 0.2: 26.5,47 32.75,47
  Top 0.25: 11.4,40.6 11.75,40.25 19.75,40.25 26.5,47
  Top 0.3: U4.31 11.4,40.6 | R4.1 R3.2 61.32,48 33.75,48 32.75,47
EN_HEAT2  (via drill 0.3)
  Top 0.3: U4.32 10.75,43.01 v11.18,43.43 | R6.1 R5.2 68.42,46.58 66.25,48.75 25.75,48.85 v20.5,43.5
  Bottom 0.3: v11.18,43.43 20.18,43.43 v20.5,43.5
EN_HEAT3  (via drill 0.3)
  Top 0.3: R8.1 R7.2 73.5,46.5 70.5,49.5 25.25,49.5 v20,44.25 | U4.33 10.1,43.4 v10,43.5
  Bottom 0.3: v20,44.25 10.5,44.25 10.1,43.85 10.1,43.6 v10,43.5
EN_SC  (via drill 0.3)
  Top 0.25: 7.5,30.5 8,31 8,33.5 8.15,33.65 U4.3
  Top 0.3: 7.5,30.5 v7.5,27.25
  Bottom 0.3: v7.5,27.25 7.5,25.76 Q100.1 R102.1 5.7,25.96 R103.2
GND  (via drill 0.3)
  Top 0.25: U6.2 U6.9 U6.10 62.73,26.77 R27.2 | U7.2 U7.9 U7.10 | U9.11 13.51,19.74 | U$1.PGND4 60.16,7.08 | U$1.PGND5 60.72,7.04 | 60.87,12.7 U$1.P$20 61.19,16.05 | U$1.PGND3 60.16,13.91 | U$1.PGND2 60.72,13.54
  Top 0.3: C_IC1.1 34.06,45.84 v34.15,45.93 | IC1.4 32.8,39.11 v32.75,39.07 | R10.2 27.71,43.85 v27.67,43.89 | C1.1 v29.07,45.04 | U4.4 8.8,32.13 C4.2 8.95,31.05 v9,31 | U4.15 15.95,32.42 C3.2 15.54,31.04 v15.5,31 | C8.1 C9.1 | R21.1 v32.74,39.07 v32.75,39.07 | R20.1 32.92,39.07 v32.75,39.07 | R18.2 40.75,42.08 C2.1 | 13.51,19.74 v13.25,20 | U7.9 44.1,26.4 44.5,26 v44.5,25 | 60.16,7.08 60.25,7 60.68,7 60.72,7.04 60.75,7 v60.75,6.75 60.75,6.5 | U$1.PGND5 60.72,9.25 U$1.PGND12 U$1.PGND11 U$1.PGND7 U$1.PGND6 U$1.PGND10 61,10.54 61,11.5 60.98,11.47 U$1.PGND9 | U$1.PGND8 U$1.PGND9 | 60.72,11.7 U$1.PGND9 | 61.19,16.05 R35.1 | 60.75,6.5 60.75,5 59.98,4.23 C36.2 C35.2 52.17,4.23 C34.2 48.71,4.13 C33.2 | 60.75,6.5 63.5,6.5 64.27,7.27 C27.1 64.62,8.17 C28.1 C29.1 C30.1 | C20.2 17.7,18.25 16.75,18.25 16.5,18 16.5,17.5 16.49,17.51 U9.7 14.01,17.51 U9.17 | U9.V_3 13.5,17.81 13.5,19.5 | 60.16,13.91 60.25,14 60.72,13.54
  Top 0.5: U11.1 U11.2 U11.3 | U8.GND4 U8.GND5 50.29,22.1 U8.GND3 | U8.GND2 51.31,21.08 U8.GND3 | U8.GND1 50.29,21.08 U8.GND3
  Top 0.8: 50.12,18.63 51,17.75 55.53,17.75
  Top 1: JP5.1 4.76,5.08 C32.1 5.08,3.92 5.91,3.09 U11.1 | C19.2 50.12,18.63 | 55.53,17.75 C16.2 C17.2 C18.2 | C19.2 49.53,18.78 50.75,20 50.75,21.54 U8.GND3 50.75,21.64 50.75,22.75 51.65,23.65 C13.2 | R30.1 48.62,19.54 C19.2
  Bottom 0.25: R104.2 62.73,34.44 U100.10 U100.9 U100.2
  Bottom 0.3: v34.15,45.93 33.89,45.93 33.77,46.05 | v32.75,39.07 33.13,39.07 33.26,38.94 | v27.67,43.89 27.42,43.89 27.16,44.15 | v29.07,45.04 29.45,44.66
  other vias: 18.75,28.75 28.75,26.25 2.25,27.5 2.25,31.25 3.5,18.25 2.25,17.75 43.25,21 47.5,18 50.75,19.25 37,12.5 43.75,13.25 56.5,43 53.75,43 51.25,43 48.75,43 46.25,43 40.75,43.25 37.75,26.5 40.25,34.25 42.5,34.25 44.5,26.5 77.5,42.75 77.5,41.5 77.5,40.25 72.25,40.25 72.25,41.5 72.25,42.75 69.75,44.25 74.75,44.25 64.75,44.25 67,42.75 67,41.5 67,40.25 69.25,25.75 68,25.75 66.75,25.75 65.25,25.75 59,25.75 58,25.75 19.5,16.25 21.75,16.25 16.5,18.25 54,4.25 55.25,4.25 60.75,4.25 62,6.75 63.25,6.75 60.5,14.5 60.75,16 55.75,18.25 64.25,19.5 65.75,19.5 67.25,19.5 68.75,19.5
  pour Bottom: 0,50 80,50 80,0 0,0
  pour Top: 0,0 0,50 80,50 80,0
GND1  (via drill 0.3)
  other vias: 83.62,22.25 83.62,21 84.5,21.62 91.38,25.5 90.12,26.25 89,27 82.88,9.38 82.99,26.64 85.62,9.25 92.5,24.62 92.62,22.25 92.62,17
  pour Top: 81.25,0 81.25,35 94.25,35 94.25,0
  pour Bottom: 81.25,0 81.25,35 94.25,35 94.25,0
HEAT1
  Top 0.5: U1.5 63.63,39.62 64.75,38.5 64.88,38.62 | U1.8 65.58,39.34 64.88,38.62 | U1.6 64.28,39.22 64.75,38.75 | 64.75,38.75 64.88,38.62 | U1.7 64.94,38.94 64.75,38.75
  Top 1: 64.75,38.5 64.75,38.25 68,38.25 71.75,34.5 71.75,32.39 JP4.12
HEAT2
  Top 0.5: U2.5 68.72,39.28 69.75,38.25 69.88,38.38 | U2.8 70.67,39.16 70.02,38.52 | U2.7 70.02,38.52 | 70.02,38.52 69.88,38.38 | U2.6 69.36,38.88 69.88,38.38
  Top 1: JP4.14 74.93,31.82 73,33.75 73,35.25 69.88,38.38
HEAT3
  Top 0.5: U3.5 73.8,39.2 74.44,38.55 | U3.6 74.44,38.55 | 74.44,38.55 74.75,38.25 75.12,38.62 | U3.8 75.75,39.24 75.12,38.62 | U3.7 75.09,38.66 75.12,38.62
  Top 1: 74.75,38.25 74.75,34.47 JP4.16
I2C_SCL
  Top 0.3: U4.13 14.65,29.77 JP3.2
I2C_SDA
  Top 0.3: U4.12 14,29.48 JP3.1
I_IN
  Top 0.3: U4.9 12.05,31.3 11.5,30.65 11.5,27.1 12.25,26.25 21,26.25 23.6,28.85 R25.1 C8.2
I_OUT
  Top 0.2: 24.59,28 28.5,28
  Top 0.3: U4.8 11.4,31.8 10.9,31 10.9,26.65 11.9,25.65 22.23,25.65 24.59,28 | 28.5,28 29.35,28.85 C9.2 R26.1
IND
  Top 0.3: U8.1 52.66,20.59 53,20.25 53,19.3 L3.P$2 53.5,19.12 53.5,20.5 52.91,21.09 U8.2
INT/OUT  (via drill 0.3)
  Top 0.406: JP7.4 86.39,10.81 85.12,12.08 83.75,12.08 83.14,12.69 83.14,16.5 83.14,18.27 83.25,18.38 | 83.25,18.38 v83.62,18.75 | v83.62,18.75 84,19.12 84.05,19.18 U$4.15 | v83.62,18.75 83.25,18.38
  Bottom 0.406: v83.62,18.75 84.27,19.4 86.04,19.4 87.38,19.4 87.38,19.38 88.32,20.32 AS5600.3
LED5
  Top 0.3: +5V.C R15.2
MISO/SCL
  Top 0.406: 86.71,13.54 JP7.3 85.53,14.72 R43.1
  Bottom 0.406: AS5600.7 87.05,13.5 JP7.3
MOSI/DIR
  Top 0.406: U$4.1 86.53,17.38 85.12,17.38 84.36,16.61 JP7.1
  Bottom 0.406: AS5600.8 85.78,14.77 JP7.1
N$1
  Top 0.25: U7.3 38.91,25.91 38.25,25.25 37.11,25.25 L2.P$1
N$2
  Top 0.3: U8.5 52.34,22.59 53.5,23.75 54.34,23.75 R28.1
N$3
  Top 0.25: U7.1 39.11,26.89 38.25,27.75 37.25,27.75 L2.P$2
N$4
  Top 1: 6.8UH.2 R_SENSE1.I1
N$5
  Top 0.3: U8.6 49.34,23.52 C13.1
N$6
  Top 0.25: U6.3 61.74,31.76 61,32.5 61,33.47 L1.P$1
N$7
  Top 0.25: U6.1 62.72,31.72 63.5,32.5 63.5,33.43 L1.P$2
N$8
  Top 0.1: 71.5,14.25 71.5,17.5 56.75,17.5 55.5,16.25 55.5,14.5
N$9
  Top 0.406: U$4.12 86.78,22.46 86.74,22.5 86.22,23.01 C39.2 86.15,23.82
  Top 0.61: R42.1 86.22,25.3 C39.2
N$10
  Top 0.406: R43.2 87.42,15.93 U$4.2
N$11
  Bottom 0.3: U100.3 61.74,29.24 61.25,28.75 61.25,27.64 L100.P$1
N$12
  Bottom 0.3: U100.1 62.72,29.28 63.5,28.5 63.5,27.53 L100.P$2
N$14
  Top 0.3: R15.1 J5.2
N$19
  Top 0.3: IC1.1 32.8,42.79 R9.1 R1.2
N$20
  Top 0.3: IC1.2 31.66,41.43 31.1,41.99 31.1,42.24 | 31.1,42.24 R9.2 | R10.1 30.97,42.37 31.1,42.24
N$21
  Top 0.3: R23.1 29.82,36.26 R21.2 29.82,39.07 31.53,40.78 IC1.3
N$22
  Top 0.3: IC1.7 38.2,41.43 R17.1 R2.2
N$23
  Top 0.3: IC1.6 38.19,40.78 R17.2 R18.1
N$24
  Top 0.3: IC1.5 37.02,39.19 R20.2 37.92,37.92 R22.1
N$25
  Top 0.3: R26.2 32,23.5 40.75,14.75 40.75,12.25 41.75,11.25 43.75,11.25 44.08,10.92 44.08,10.5 U$3.6
N$26
  Top 0.3: U$2.6 36.21,10.5 38,10.5 38,15.25 28.5,24.75 26.75,24.75 25.5,26 R25.2
N$27
  Top 0.3: R7.1 73.5,43.09 U3.4
N$30
  Top 0.3: U4.6 10.1,33.25 10.4,32.95 10.4,29.7 9.6,29 8.99,29 Q1.P1
N$31
  Top 0.3: R5.1 68.42,43.09 U2.4
N$32
  Top 0.3: U$3.4 42.76,10.14 R_SENSE2.V1
N$33
  Top 0.3: U$3.5 43.41,10 R_SENSE2.V2
N$34
  Top 0.3: U$2.4 34.89,10.14 RSENSE1.V1
N$35
  Top 0.3: U$2.5 35.54,10 RSENSE1.V2
N$36
  Top 0.3: U4.5 9.45,33.05 9.8,32.7 9.8,30.05 9.5,29.75 8.94,29.75 Q1.P2
N$37
  Top 0.3: R3.1 63.34,43.09 U1.4
N$38
  Top 0.25: U$1.P$8 58.23,9.22 57.15,8.15
  Top 0.3: 57.15,8.15 C31.2
N$39
  Top 0.3: +3V3_M.C R12.2
N$40
  Top 0.3: R12.1 J2.2
N$43
  Top 0.3: VCC.C R11.2
N$45
  Top 0.3: R11.1 J1.2
N$46
  Top 0.3: +3V3_2.C R14.2
N$47
  Top 0.3: R14.1 J4.2
N$48
  Top 0.3: +11V.C R16.2
N$49
  Top 0.3: R16.1 J6.2
N$50
  Top 0.3: U$1.P$4 54.75,11.22 54.75,11.25 54.52,11.25 54.52,11 L4.P$2 | U$1.P$5 54.52,10.72 L4.P$2 | U$1.P$6 54.52,10.22 L4.P$2 | U$1.P$7 54.52,9.72 L4.P$2
  Top 1: L4.P$2 57.15,10.16 C31.1 R39.2 | 57.15,11 54.52,11
N$51
  Top 0.3: +3V3_1.C R13.2
N$52
  Top 0.3: R13.1 J3.2
N$53
  Top 0.3: U$1.P$3 58.02,11.72 57.5,12.25 57.5,12.45 R39.1
N$54
  Top 0.3: C25.1 67.31,13.12 R37.1
N$56
  Top 0.3: U$1.P$10 59.19,7.75 C36.1
N$57
  Top 0.3: U$1.P$19 62.16,14.32 R35.2
N$58
  Top 0.25: U$1.P$18 64.22,11.72
  Top 0.3: 64.22,11.72 R37.2 64.77,13.12 C24.1
N$59
  Top 0.3: U$1.P$1 59.69,13.12 C23.1
N$60
  Top 0.25: U$1.P$17 68.06,11.22
  Top 0.3: 68.06,11.22 R38.1 69.52,14.06 R36.2
N$64  (via drill 0.3)
  Top 0.25: U9.2 13.51,13.74
  Top 0.3: 13.51,13.74 14,13.25 23.5,13.25 26,15.75 v26,18.25 | v11.25,20.25 11.25,21 13.25,23 25.75,23 v26,23.25
  Bottom 0.3: R101.1 8.5,21.62 R100.2 | Q100.3 8.4,21.72 R100.2 | R100.2 8.57,20.68 9,20.25 v11.25,20.25 | v26,18.25 v26,23.25
N$65
  Top 1: R41.1 C22.1
N$66
  Top 0.3: STAT1.A R31.1
N$67
  Top 0.3: STAT2.C J7.2
N$68
  Top 0.3: STAT1.C J8.2
N$69
  Top 0.3: STAT2.A R29.1
N$70  (via drill 0.3)
  Top 0.25: U9.5 15.51,15.74
  Top 0.3: 15.51,15.74 16.25,15 22.75,15 23.5,15.75 v23.5,18.25 | J7.1 9.67,22.92 11.25,24.5 v23.5,24.5
  Bottom 0.3: v23.5,18.25 v23.5,24.5
N$71  (via drill 0.3)
  Top 0.25: U9.3 14.01,14.24
  Top 0.3: 14.01,14.24 14.25,14 23,14 24.75,15.75 v24.75,18.25 | v24.75,23.75 13.1,23.75 J8.1
  Bottom 0.3: v24.75,18.25 v24.75,23.75
N$72
  Top 0.25: U9.6 17.24,17.01
  Top 0.3: 17.24,17.01 C20.1
N$73
  Top 0.25: U9.1 9.01,15.51 8,14.5
  Top 0.3: R40.2 4.91,14.42 | 4.91,14.42 C21.1 | 8,14.5 4.99,14.5 4.91,14.42
N$75
  Top 0.25: 3,37 3,44.2
  Top 0.3: U4.1 5.75,34.25 3,37 | 3,44.2 JP2.2
N$76  (via drill 0.3)
  Top 0.25: U9.14 v10.26,17.51
  Top 0.3: U10.3 10.71,9.96 11,10.25 v11,14 | v10.26,17.51 v10.25,17.5
  Top 0.5: U11.8 7.92,6.42 8.38,6.88 | 8.38,6.88 8.5,7 9.5,7 | U11.7 8.56,6.68 8.38,6.88 | U11.6 9.21,6.71 9.5,7 | U11.5 9.87,6.63 9.5,7 | U10.2 11,9.31 | U10.3 11,9.96 | U10.1 11,8.66
  Top 0.75: 11,8.75 11,9.31 11,9.96 | 11,8.66 11,8.5
  Top 1: 9.5,7 10.25,7 11,7.75 11,8 | 11,8 11,8.5 11,8.75 | 6.8UH.1 11.38,7.62 11,8
  Bottom 0.25: v10.25,17.5 10.25,14.75 v11,14
  Bottom 0.3: v10.25,17.5 8.44,17.5 C100.1
N$77  (via drill 0.3)
  Top 0.25: U9.10 14.01,20.34
  Top 0.3: 14.01,20.34 C15.2 13.26,21.51 13.75,22 29.5,22 32.25,19.25 v32.25,15.5 | v28,10.75 28,9.08 R_SENSE1.V1
  Bottom 0.3: v32.25,15.5 30.5,15.5 28,13 v28,10.75
N$78  (via drill 0.3)
  Top 0.25: U9.9 14.51,20.64
  Top 0.3: 14.51,20.64 C15.1 28.91,21.09 31.5,18.5 v31.5,14 | v30.75,10.75 30.75,9.08 R_SENSE1.V2
  Bottom 0.3: v30.75,10.75 30.75,13.25 v31.5,14
N$80  (via drill 0.3)
  Top 0.25: U9.15 10.76,17.01 10.5,16.75 v9.5,16.75
  Top 0.3: U10.4 10.33,13.42 v9.75,14
  Bottom 0.25: v9.75,14 9.75,16.5 v9.5,16.75
N$81  (via drill 0.3)
  Top 0.25: U9.13 11.24,18.01 v11,18.25
  Top 0.3: U11.4 15.09,3.09 16.5,4.5 16.5,11 15,12.5 13.5,12.5 v12,14
  Bottom 0.3: v11,18.25 11,15 v12,14
N$82
  Top 0.25: U9.8 15.51,18.51
  Top 0.3: 15.51,18.51 16.25,19.25 21.75,19.25 | 21.75,19.25 26.9,19.25 R32.1 R34.1 C26.2 | R33.2 21.6,19.1 21.75,19.25
N$84  (via drill 0.3)
  Top 0.3: U9.12 10.25,19 9.46,18.21 D1.1 D1.2 5.04,18.21 v5,18.25
  Bottom 0.3: C101.1 5.2,18.45 v5,18.25
N$85  (via drill 0.3)
  Top 0.25: 10.51,16.01 11,16.5 U9.16
  Top 0.3: 10.51,16.01 D1.3 6.51,16.01 v6,15.5 | U9.16
  Bottom 0.3: C100.2 6.16,15.66 v6,15.5
N$93
  Top 0.25: 5,38.25 6.5,36.75 9.75,36.75 10.75,35.75
  Top 0.3: JP2.1 4.72,46.78 5,46.5 5,39 | 5,39 5,38.25 | 10.75,35.75 U4.7 | R19.1 4.96,38.96 5,39
N$99
  Top 0.3: U4.16 16.6,32.64 C3.1 | 18.94,32.25 FERRITE.2
  Top 0.5: C3.1 18.94,32.25
SC+  (via drill 0.3)
  Top 0.3: R41.2 2.46,10.5 2,10.5 1,11.5 1,18.25 1.69,18.94 R31.2 R29.2 1.75,22.92 1.75,24 2.25,24.5 v4.25,24.5 4.9,25.05 22.65,25.05 23.2,25.5 v24.5,25.5 | R40.1 4.91,9.99 4.88,9.96 JP5.2 | R22.2 34.65,35.9 33.5,34.75 33.5,26 v33,25.5
  Top 1: JP5.2 4.76,7.62 C32.2 | JP5.2 R41.2 | U10.5 U10.6 | U10.6 U10.7 U10.8 | U10.6 4.88,9.96 JP5.2
  Bottom 0.3: R101.2 4.5,21.71 4.5,23 5.45,23.95 R102.2 4.96,24.5 v4.25,24.5 | v33,25.5 v24.5,25.5
SC_OUT
  Top 0.3: R32.2 R34.2 C26.1 30.25,13.75 32.25,11.75 32.25,7.87 32.5,7.62
  Top 1: C37.1 30.94,7.37 R_SENSE1.I2 32.5,7.62 RSENSE1.I1 33.75,7.6 C38.1
SCLK/SDA
  Top 0.406: U$4.3 88.08,16.8 88.5,16.38 89.12,15.75 89.44,15.43 JP7.5
  Bottom 0.406: 89.3,13.5 JP7.5 88.32,14.47 AS5600.6
V_BAT
  Top 0.3: U4.29 12.7,41.15 13.22,40.76 19.51,40.76 26.6,47.85 C1.2 R1.1
V_SC
  Top 0.2: 39.75,41.25 40,41 41.75,41 42.25,40.5 | 31.5,35 29,35
  Top 0.25: 41.75,36.75 33.25,36.75
  Top 0.3: C2.2 R2.1 39.61,46.14 arc-90 39.75,46 39.75,41.25 | U4.10 12.7,30.95 12.1,30.25 12.1,27.35 12.5,26.85 20.5,26.85 24,30.25 27.75,30.25 28.5,31 28.5,34.5 29,35 | 42.25,40.5 42.25,37.25 41.75,36.75 | 33.25,36.75 31.5,35

## Text on the board
tNames: RST | GND | A1 | A2 | A3 | A4 | TST | H3 | VBAT | L1 | H2 | H1 | VBAT | VBAT | +3V3-2 | SDA | SCL | GND | +3V3-1 | L2 | GND | +3V3-M | AS5050A | +5V | GND | GND | L3 | +11V | GND | SCK CS | MOSI | L4 | 3V3 INT GND | SC+ | VBAT | GND | GND | Octanis_1 EPS v0.5
bNames: Octanis 1 Magnetic Rotation Sensor | www.octanis.org | L100 | DIR SCL SDA PGO | GND OUT 3V3 | Octanis_1 EPS v0.5
_tNames: R8 | C1 | C2 | R1
_bNames: C4 | C3